# EAGLE board snesram (EAGLE 5.06), part 1 of 2
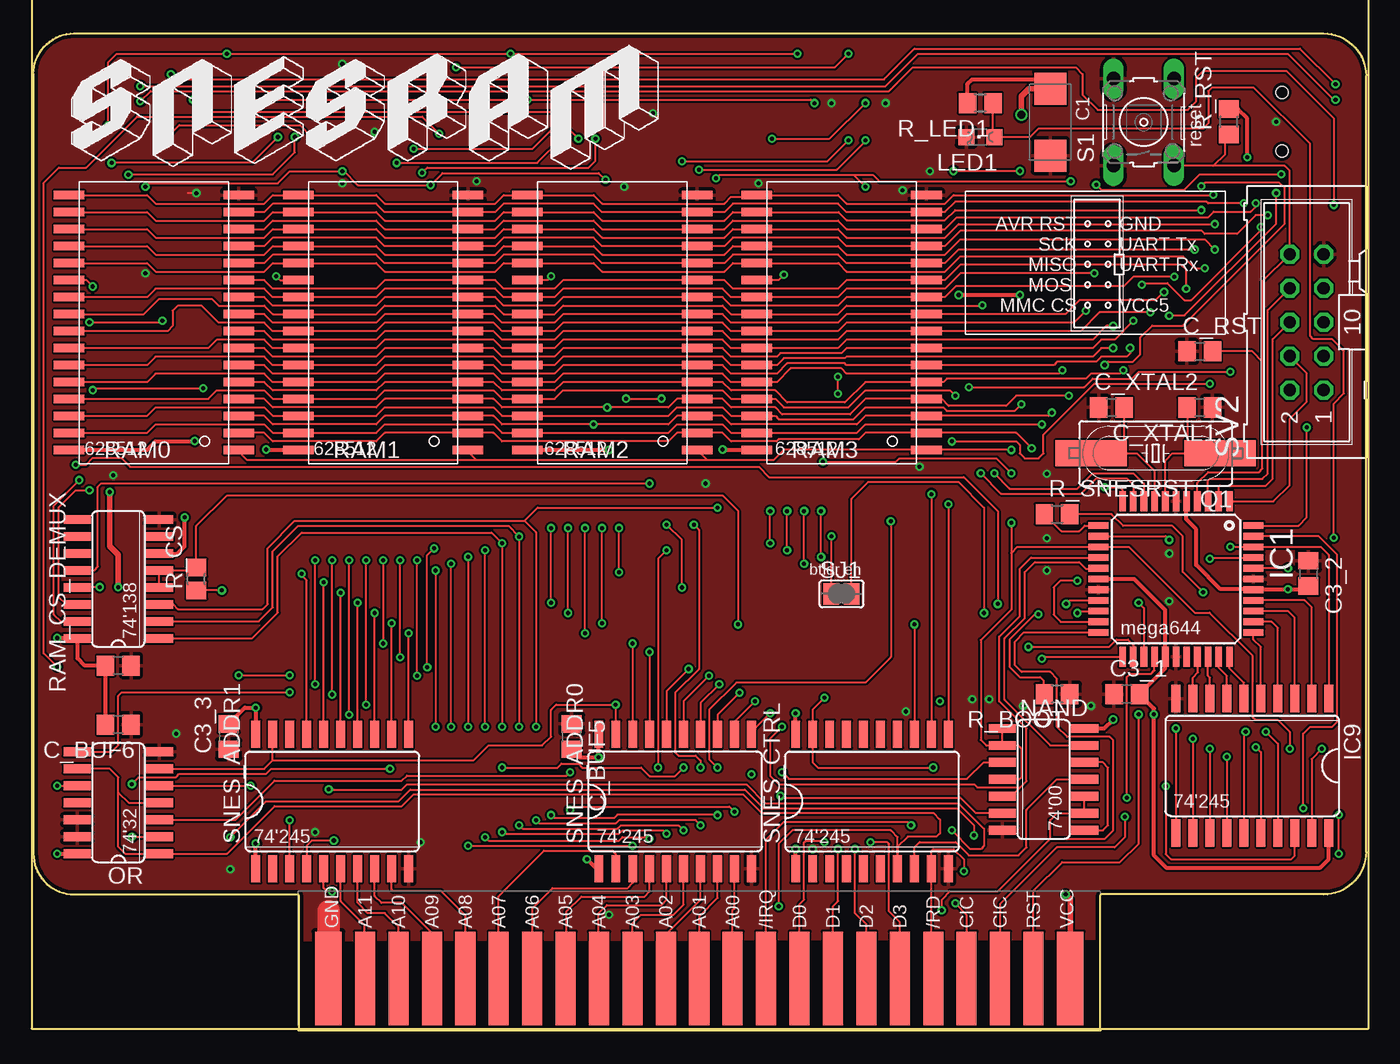
[diagram p0: board, top side]
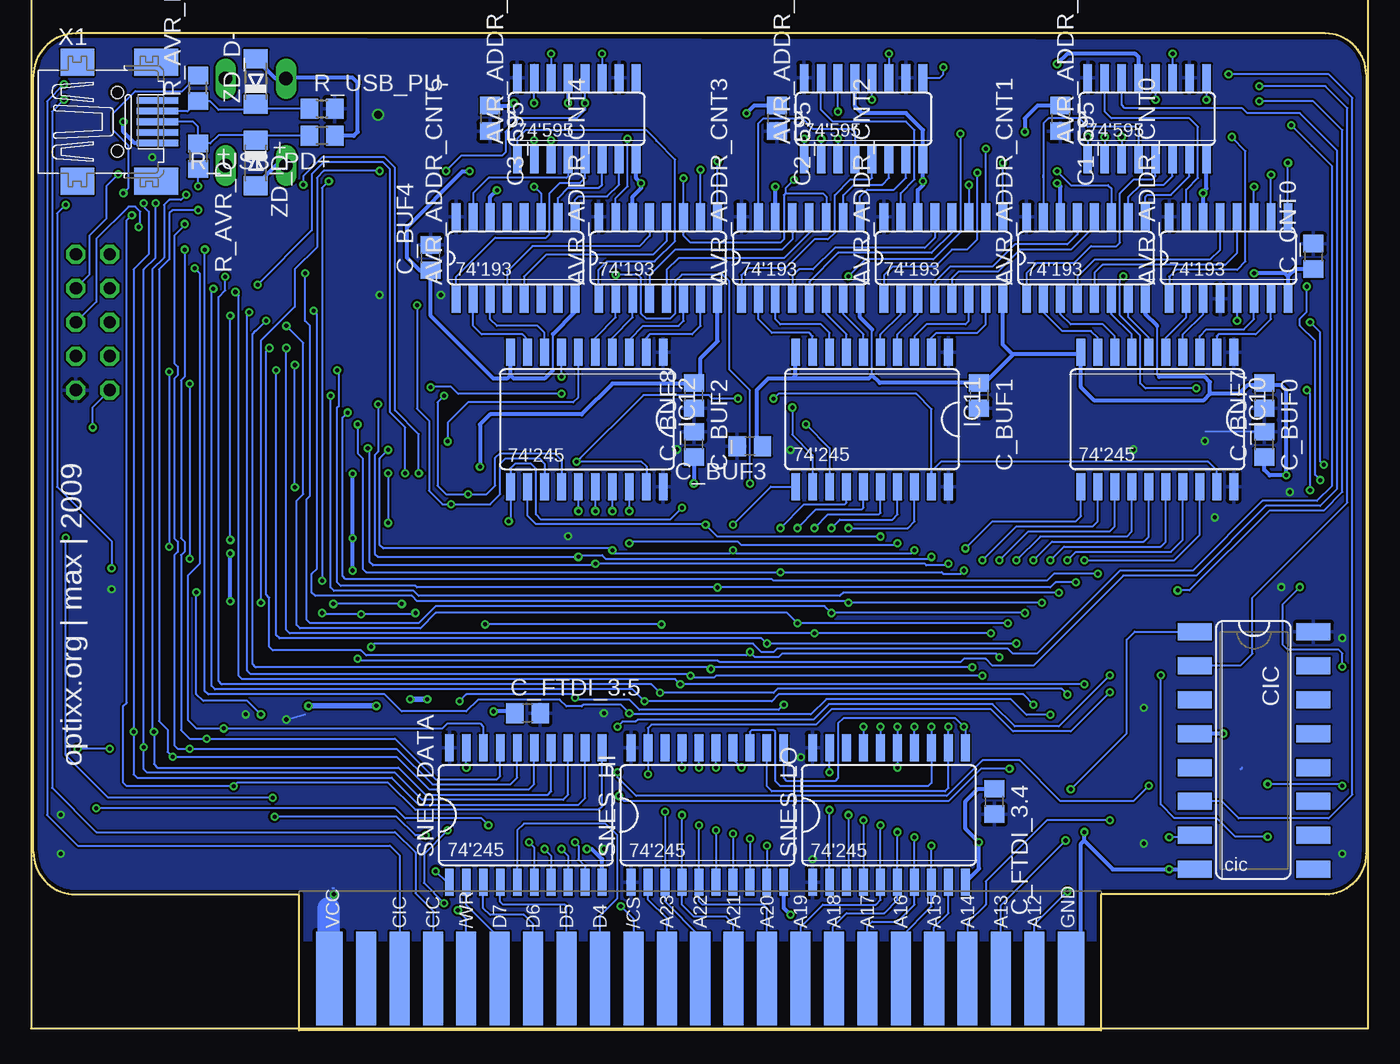
[diagram p1: board, bottom side, seen from below]

Size 99.7 x 74.55 mm. Coordinates in mm from the lower left corner, seen from the top.
Outline: 99.7,71.34 99.7,13.33 arc-90 96.52,10.16 79.88,10.16
Outline: 19.84,10.11 19.84,0 79.83,0 79.83,10.11
Outline: 19.81,10.16 3.05,10.16 arc-90 0,13.21 0,71.5 arc-90 3.05,74.55 96.52,74.55 arc-90 99.7,71.37
Copper layers (1*16): Top 0.035mm / dielectric 1.5mm / Bottom 0.035mm
Design rules "PropagandaPCB": minimum track width 6mil, minimum drill 10mil, track to track 6mil, track to pad 6mil, pad to pad 6mil, via to via 6mil, smd to smd 6mil, copper to edge 10mil, drill to drill 10mil, minimum pad ring 10mil, minimum via ring 6mil, stop-mask expansion 2mil, vias tented up to drill 100mil, thermal gap 10mil
Milling: 4 lines

## Footprints (pad centres in the part's own frame; a part is rotated, then mirrored left to right if it is on the bottom)
SO16 = smd 0.66 x 2.032: 1 -4.445,-3.073; 2 -3.175,-3.073; 3 -1.905,-3.073; 4 -0.635,-3.073; 5 0.635,-3.073; 6 1.905,-3.073; 7 3.175,-3.073; 8 4.445,-3.073; 9 4.445,3.073; 10 3.175,3.073; 11 1.905,3.073; 12 0.635,3.073; 13 -0.635,3.073; 14 -1.905,3.073; 15 -3.175,3.073; 16 -4.445,3.073
SMC_C = smd 2.4 x 2.4: + -2.5,0; - 2.5,0
C0805 = smd 1.3 x 1.5: 1 -0.95,0; 2 0.95,0
DIL16_SMD = smd 1.27 x 2.54: 1 -8.89,-4.445; 2 -6.35,-4.445; 3 -3.81,-4.445; 4 -1.27,-4.445; 5 1.27,-4.445; 6 3.81,-4.445; 7 6.35,-4.445; 8 8.89,-4.445; 9 8.89,4.445; 10 6.35,4.445; 11 3.81,4.445; 12 1.27,4.445; 13 -1.27,4.445; 14 -3.81,4.445; 15 -6.35,4.445; 16 -8.89,4.445
TQFP44 = smd 1.5 x 0.5: 1 -5.8,4; 2 -5.8,3.2; 3 -5.8,2.4; 4 -5.8,1.6; 5 -5.8,0.8; 6 -5.8,0; 7 -5.8,-0.8; 8 -5.8,-1.6; 9 -5.8,-2.4; 10 -5.8,-3.2; 11 -5.8,-4; 23 5.8,-4; 24 5.8,-3.2; 25 5.8,-2.4; 26 5.8,-1.6; 27 5.8,-0.8; 28 5.8,0; 29 5.8,0.8; 30 5.8,1.6; 31 5.8,2.4; 32 5.8,3.2; 33 5.8,4 | smd 0.5 x 1.5: 12 -4,-5.8; 13 -3.2,-5.8; 14 -2.4,-5.8; 15 -1.6,-5.8; 16 -0.8,-5.8; 17 0,-5.8; 18 0.8,-5.8; 19 1.6,-5.8; 20 2.4,-5.8; 21 3.2,-5.8; 22 4,-5.8; 34 4,5.8; 35 3.2,5.8; 36 2.4,5.8; 37 1.6,5.8; 38 0.8,5.8; 39 0,5.8; 40 -0.8,5.8; 41 -1.6,5.8; 42 -2.4,5.8; 43 -3.2,5.8; 44 -4,5.8
SO20W = smd 0.66 x 2.032: 1 -5.715,-5.029; 2 -4.445,-5.029; 3 -3.175,-5.029; 4 -1.905,-5.029; 5 -0.635,-5.029; 6 0.635,-5.029; 7 1.905,-5.029; 8 3.175,-5.029; 9 4.445,-5.029; 10 5.715,-5.029; 11 5.715,5.029; 12 4.445,5.029; 13 3.175,5.029; 14 1.905,5.029; 15 0.635,5.029; 16 -0.635,5.029; 17 -1.905,5.029; 18 -3.175,5.029; 19 -4.445,5.029; 20 -5.715,5.029
CHIPLED_0805 = smd 1.2 x 1.2: A 0,-1.05; C 0,1.05
SO14 = smd 0.66 x 2.032: 1 -3.81,-3.073; 2 -2.54,-3.073; 3 -1.27,-3.073; 4 0,-3.073; 5 1.27,-3.073; 6 2.54,-3.073; 7 3.81,-3.073; 8 3.81,3.073; 9 2.54,3.073; 10 1.27,3.073; 11 0,3.073; 12 -1.27,3.073; 13 -2.54,3.073; 14 -3.81,3.073
HC49UP = smd 5.334 x 1.93: 1 -4.826,0; 2 4.826,0
R0805 = smd 1.3 x 1.5: 1 -0.95,0; 2 0.95,0
R0805' = smd 1.3 x 1.5: 1 -0.85,0; 2 0.85,0
MEMORY-SAMSUNG-2_SOP-32 = smd 0.635 x 2.286: 1 -9.525,-6.35; 2 -8.255,-6.35; 3 -6.985,-6.35; 4 -5.715,-6.35; 5 -4.445,-6.35; 6 -3.175,-6.35; 7 -1.905,-6.35; 8 -0.635,-6.35; 9 0.635,-6.35; 10 1.905,-6.35; 11 3.175,-6.35; 12 4.445,-6.35; 13 5.715,-6.35; 14 6.985,-6.35; 15 8.255,-6.35; 16 9.525,-6.35; 17 9.525,6.35; 18 8.255,6.35; 19 6.985,6.35; 20 5.715,6.35; 21 4.445,6.35; 22 3.175,6.35; 23 1.905,6.35; 24 0.635,6.35; 25 -0.635,6.35; 26 -1.905,6.35; 27 -3.175,6.35; 28 -4.445,6.35; 29 -5.715,6.35; 30 -6.985,6.35; 31 -8.255,6.35; 32 -9.525,6.35
B3F-10XX = drill 1.016 long: 1 -3.251,2.261; 2 3.251,2.261; 3 -3.251,-2.261; 4 3.251,-2.261
SJ = smd 1.168 x 1.6: 1 -0.762,0; 2 0.762,0
ML10 = drill 0.914 octagon: 1 -5.08,-1.27; 2 -5.08,1.27; 3 -2.54,-1.27; 4 -2.54,1.27; 5 0,-1.27; 6 0,1.27; 7 2.54,-1.27; 8 2.54,1.27; 9 5.08,-1.27; 10 5.08,1.27
SNES_CON = smd 2 x 7: 5 2.25,3.5; 27 57.75,3.5 | smd 1.5 x 7: 6 5,3.5; 7 7.5,3.5; 8 10,3.5; 9 12.5,3.5; 10 15,3.5; 11 17.5,3.5; 12 20,3.5; 13 22.5,3.5; 14 25,3.5; 15 27.5,3.5; 16 30,3.5; 17 32.5,3.5; 18 35,3.5; 19 37.5,3.5; 20 40,3.5; 21 42.5,3.5; 22 45,3.5; 23 47.5,3.5; 24 50,3.5; 25 52.5,3.5; 26 55,3.5 | smd 2 x 7 bottom: 36 2.25,3.5; 58 57.75,3.5 | smd 1.5 x 7 bottom: 37 5,3.5; 38 7.5,3.5; 39 10,3.5; 40 12.5,3.5; 41 15,3.5; 42 17.5,3.5; 43 20,3.5; 44 22.5,3.5; 45 25,3.5; 46 27.5,3.5; 47 30,3.5; 48 32.5,3.5; 49 35,3.5; 50 37.5,3.5; 51 40,3.5; 52 42.5,3.5; 53 45,3.5; 54 47.5,3.5; 55 50,3.5; 56 52.5,3.5; 57 55,3.5
CON-CYPRESSINDUSTRIES_32005-201 = smd 0.5 x 3.1: 1 1.6,-9.027; 2 0.8,-9.027; 3 0,-9.027; 4 -0.8,-9.027; 5 -1.6,-9.027 | smd 2 x 2.5: M1 -4.45,-3.027; M2 4.45,-3.027 | smd 2 x 3.3: M3 4.45,-8.928; M4 -4.45,-8.928 | hole 0.9: 2.2,-6.027; -2.2,-6.027
MINIMELF = smd 1.4 x 1.8: A 1.7,0; C -1.7,0

## Placement (x,y rotation side)
AVR_ADDR_CNT0  40193D  [SO16]  10.29,57.77 0 bottom
AVR_ADDR_CNT1  40193D  [SO16]  20.96,57.75 0 bottom
AVR_ADDR_CNT2  40193D  [SO16]  31.62,57.75 0 bottom
AVR_ADDR_CNT3  40193D  [SO16]  42.29,57.75 0 bottom
AVR_ADDR_CNT4  40193D  [SO16]  52.96,57.75 0 bottom
AVR_ADDR_CNT5  40193D  [SO16]  63.63,57.75 0 bottom
AVR_ADDR_SREG0  74HCT595D  [SO16]  16.38,68.17 0 bottom
AVR_ADDR_SREG1  74HCT595D  [SO16]  37.59,68.17 0 bottom
AVR_ADDR_SREG2  74HCT595D  [SO16]  59.05,68.17 0 bottom
C1  [SMC_C]  76.07,67.91 270 top
C1_595  100n  [C0805]  22.86,68.2 270 bottom
C2_595  100n  [C0805]  44.07,68.2 270 bottom
C3_1  100n  [C0805]  81.79,25.15 0 top
C3_2  100n  [C0805]  95.38,34.16 270 top
C3_3  100n  [C0805]  14.6,21.97 90 top
C3_595  100n  [C0805]  65.53,68.2 270 bottom
C_BUF0  100n  [C0805]  7.62,47.47 270 bottom
C_BUF1  100n  [C0805]  28.96,47.47 270 bottom
C_BUF2  100n  [C0805]  50.29,47.47 270 bottom
C_BUF3  100n  [C0805]  46.1,43.69 180 bottom
C_BUF4  100n  [C0805]  69.98,57.78 90 bottom
C_BUF5  100n  [C0805]  40.26,21.97 270 top
C_BUF6  100n  [C0805]  6.35,22.86 180 top
C_BUF7  100n  [C0805]  7.62,43.81 90 bottom
C_BUF8  100n  [C0805]  50.29,43.81 90 bottom
C_CNT0  100n  [C0805]  3.94,57.88 90 bottom
C_DEMUX  100n  [C0805]  6.35,27.27 180 top
C_FTDI_3.4  100n  [C0805]  27.81,17.11 270 bottom
C_FTDI_3.5  100n  [C0805]  62.74,23.72 0 bottom
C_RST  47n  [C0805]  87.25,50.77 0 top
C_XTAL1  22p  [C0805]  87.25,46.58 180 top
C_XTAL2  22p  [C0805]  80.65,46.58 0 top
CIC  DIL16_SMD  [DIL16_SMD]  8.38,20.92 270 bottom
IC1  ATMEGA644A  [TQFP44]  85.47,33.75 270 top
IC9  74LS245DW  [SO20W]  91.19,19.78 180 top
IC10  74LS245DW  [SO20W]  15.62,45.69 180 bottom
IC11  74LS245DW  [SO20W]  36.96,45.69 180 bottom
IC12  74LS245DW  [SO20W]  58.29,45.69 180 bottom
LED1  2-4mA  [CHIPLED_0805]  70.83,66.8 90 top
NAND  74S00D  [SO14]  75.56,18.76 270 top
OR  74HC32D  [SO14]  6.35,17.02 90 top
Q1  20MHz  [HC49UP]  83.95,43.15 180 top
R_AVR_D+  68  [R0805]  87.38,65.37 270 bottom
R_AVR_D-  68  [R0805]  87.38,70.45 90 bottom
R_BOOT  10k  [R0805]  76.58,25.15 180 top
R_CS  200  [R0805']  12.19,33.75 90 top
R_LED1  1k6  [R0805]  70.83,69.34 180 top
R_RST  4k7  [R0805]  89.44,67.94 90 top
R_SNESRST  200  [R0805]  76.58,38.61 0 top
R_USB_PD+  1M  [R0805]  78.11,66.9 180 bottom
R_USB_PU-  1k5  [R0805]  78.11,68.93 0 bottom
RAM0  KM628512-XX  [MEMORY-SAMSUNG-2_SOP-32]  9.02,52.93 90 top
RAM1  KM628512-XX  [MEMORY-SAMSUNG-2_SOP-32]  26.16,52.93 90 top
RAM2  KM628512-XX  [MEMORY-SAMSUNG-2_SOP-32]  43.31,52.93 90 top
RAM3  KM628512-XX  [MEMORY-SAMSUNG-2_SOP-32]  60.45,52.93 90 top
RAM_CS_DEMUX  74LS138D  [SO16]  6.35,33.75 90 top
S1  [B3F-10XX]  83.06,67.91 90 top
SJ1  [SJ]  60.45,32.64 0 top
SNES_ADDR0  74LS245DW  [SO20W]  48.01,17.11 0 top
SNES_ADDR1  74LS245DW  [SO20W]  22.35,17.11 0 top
SNES_CTRL  74LS245DW  [SO20W]  62.74,17.11 0 top
SNES_DATA  74LS245DW  [SO20W]  62.86,16.1 0 bottom
SNES_HI  74LS245DW  [SO20W]  49.28,16.1 0 bottom
SNES_LO  74LS245DW  [SO20W]  35.69,16.1 0 bottom
SV2  [ML10]  95.25,52.96 90 top
U$3  SNES_CON_FRONT  [SNES_CON]  19.81,0.38 0 top
X1  MINI-USB  [CON-CYPRESSINDUSTRIES_32005-201]  99.44,67.94 90 bottom
ZD_D+  3.6V  [MINIMELF]  83.06,64.86 270 bottom
ZD_D-  3.6V  [MINIMELF]  83.06,70.96 90 bottom

## Library data of the parts
AVR_ADDR_CNT0 AVR_ADDR_CNT1-AVR_ADDR_CNT5 = 40xx
AVR_ADDR_SREG0 AVR_ADDR_SREG1 AVR_ADDR_SREG2 IC9-IC12 OR RAM_CS_DEMUX SNES_ADDR0 SNES_ADDR1 SNES_CTRL SNES_DATA SNES_HI SNES_LO = 74xx-eu
C1 C1_595 C2_595 C3_1-C3_3 C3_595 C_BUF0 C_BUF1-C_BUF8 C_CNT0 C_DEMUX C_FTDI_3.4 C_FTDI_3.5 C_RST C_XTAL1 C_XTAL2 R_AVR_D+ R_AVR_D- R_BOOT R_LED1 R_RST R_SNESRST R_USB_PD+ R_USB_PU- = rcl
CIC = ic-package
IC1 = atmel
LED1 = led
NAND = 74xx-us
Q1 = crystal
R_CS = resistor
RAM0 RAM1-RAM3 X1 = snesram
S1 = switch-omron
SJ1 = jumper
SV2 = con-harting-ml
U$3 = snes_con
ZD_D+ ZD_D- = diode

## Nets
A0: IC10.16 RAM0.12 RAM1.12 RAM2.12 RAM3.12 SNES_ADDR0.11
A1: IC10.15 RAM0.11 RAM1.11 RAM2.11 RAM3.11 SNES_ADDR0.12
A2: IC10.17 RAM0.10 RAM1.10 RAM2.10 RAM3.10 SNES_ADDR0.13
A3: IC10.18 RAM0.9 RAM1.9 RAM2.9 RAM3.9 SNES_ADDR0.14
A4: IC10.12 RAM0.8 RAM1.8 RAM2.8 RAM3.8 SNES_ADDR0.15
A5: IC10.11 RAM0.7 RAM1.7 RAM2.7 RAM3.7 SNES_ADDR0.16
A6: IC10.13 RAM0.6 RAM1.6 RAM2.6 RAM3.6 SNES_ADDR0.17
A7: IC10.14 RAM0.5 RAM1.5 RAM2.5 RAM3.5 SNES_ADDR0.18
A8: IC11.16 RAM0.27 RAM1.27 RAM2.27 RAM3.27 SNES_ADDR1.11
A9: IC11.15 RAM0.26 RAM1.26 RAM2.26 RAM3.26 SNES_ADDR1.12
A10: IC11.17 RAM0.23 RAM1.23 RAM2.23 RAM3.23 SNES_ADDR1.13
A11: IC11.18 RAM0.25 RAM1.25 RAM2.25 RAM3.25 SNES_ADDR1.14
A12: IC11.12 RAM0.4 RAM1.4 RAM2.4 RAM3.4 SNES_ADDR1.15
A13: IC11.11 RAM0.28 RAM1.28 RAM2.28 RAM3.28 SNES_ADDR1.16
A14: IC11.13 RAM0.3 RAM1.3 RAM2.3 RAM3.3 SNES_ADDR1.17
A15: IC11.14 RAM0.31 RAM1.31 RAM2.31 RAM3.31 SNES_HI.11 SNES_LO.11
A16: IC12.16 RAM0.2 RAM1.2 RAM2.2 RAM3.2 SNES_HI.12 SNES_LO.12
A17: IC12.15 RAM0.30 RAM1.30 RAM2.30 RAM3.30 SNES_HI.13 SNES_LO.13
A18: IC12.17 RAM0.1 RAM1.1 RAM2.1 RAM3.1 SNES_HI.14 SNES_LO.14
A19: IC12.18 RAM_CS_DEMUX.1 SNES_HI.15 SNES_LO.15
A20: IC12.12 RAM_CS_DEMUX.2 SNES_HI.16 SNES_LO.16
A21: IC12.11 RAM_CS_DEMUX.3 SNES_HI.17 SNES_LO.17
AVR/SNES_SW: IC1.14 IC9.19 IC10.19 IC11.19 IC12.19 NAND.1 NAND.2 NAND.4
AVR/SNES_SW_INV: OR.6 SNES_ADDR0.19 SNES_ADDR1.19 SNES_CTRL.19 SNES_DATA.19
AVR_ADDR_LATCH: AVR_ADDR_SREG0.12 AVR_ADDR_SREG1.12 AVR_ADDR_SREG2.12 IC1.25
AVR_ADDR_LOAD: AVR_ADDR_CNT0.11 AVR_ADDR_CNT1.11 AVR_ADDR_CNT2.11 AVR_ADDR_CNT3.11 AVR_ADDR_CNT4.11 AVR_ADDR_CNT5.11 IC1.21
AVR_ADDR_SCK: AVR_ADDR_SREG0.11 AVR_ADDR_SREG1.11 AVR_ADDR_SREG2.11 IC1.24
AVR_ADDR_SER: AVR_ADDR_SREG0.14 IC1.23
AVR_ADDR_UP: AVR_ADDR_CNT0.5 IC1.19
AVR_CS/: IC1.40 R_CS.1
AVR_D0: IC1.37 IC9.2
AVR_D1: IC1.36 IC9.3
AVR_D2: IC1.35 IC9.4
AVR_D3: IC1.34 IC9.5
AVR_D4: IC1.33 IC9.6
AVR_D5: IC1.32 IC9.7
AVR_D6: IC1.31 IC9.8
AVR_D7: IC1.30 IC9.9
AVR_D+: R_AVR_D+.1 R_USB_PD+.2 X1.3 ZD_D+.C
AVR_D-: R_AVR_D-.1 R_USB_PU-.1 X1.2 ZD_D-.C
AVR_RD/: IC1.42 IC9.1 IC12.7
AVR_SNES_WR_EN: IC1.16 NAND.13
AVR_UART_RX: IC1.9 SV2.5
AVR_UART_TX: IC1.10 SV2.7
AVR_WR/: IC1.41 IC12.6
CS/: R_CS.2 RAM_CS_DEMUX.4 RAM_CS_DEMUX.5 SNES_CTRL.13
CS_RAM0: RAM0.22 RAM_CS_DEMUX.15
CS_RAM1: RAM1.22 RAM_CS_DEMUX.14
CS_RAM2: RAM2.22 RAM_CS_DEMUX.13
CS_RAM3: RAM3.22 RAM_CS_DEMUX.12
D0: IC9.18 RAM0.13 RAM1.13 RAM2.13 RAM3.13 SNES_DATA.11
D1: IC9.17 RAM0.14 RAM1.14 RAM2.14 RAM3.14 SNES_DATA.12
D2: IC9.16 RAM0.15 RAM1.15 RAM2.15 RAM3.15 SNES_DATA.13
D3: IC9.15 RAM0.17 RAM1.17 RAM2.17 RAM3.17 SNES_DATA.14
D4: IC9.14 RAM0.18 RAM1.18 RAM2.18 RAM3.18 SNES_DATA.15
D5: IC9.13 RAM0.19 RAM1.19 RAM2.19 RAM3.19 SNES_DATA.16
D6: IC9.12 RAM0.20 RAM1.20 RAM2.20 RAM3.20 SNES_DATA.17
D7: IC9.11 RAM0.21 RAM1.21 RAM2.21 RAM3.21 SNES_DATA.18
GND: AVR_ADDR_CNT0.8 AVR_ADDR_CNT0.14 AVR_ADDR_CNT1.8 AVR_ADDR_CNT1.14 AVR_ADDR_CNT2.8 AVR_ADDR_CNT2.14 AVR_ADDR_CNT3.8 AVR_ADDR_CNT3.14 AVR_ADDR_CNT4.8 AVR_ADDR_CNT4.14 AVR_ADDR_CNT5.8 AVR_ADDR_CNT5.14 AVR_ADDR_SREG0.8 AVR_ADDR_SREG0.13 AVR_ADDR_SREG1.8 AVR_ADDR_SREG1.13 AVR_ADDR_SREG2.8 AVR_ADDR_SREG2.13 C1.- C1_595.1 C2_595.1 C3_1.1 C3_2.1 C3_3.1 C3_595.1 C_BUF0.1 C_BUF1.1 C_BUF2.1 C_BUF3.1 C_BUF4.1 C_BUF5.1 C_BUF6.1 C_BUF7.1 C_BUF8.1 C_CNT0.1 C_DEMUX.1 C_FTDI_3.4.1 C_FTDI_3.5.1 C_RST.1 C_XTAL1.1 C_XTAL2.1 CIC.4 CIC.8 IC1.6 IC1.18 IC1.28 IC1.39 IC9.10 IC10.10 IC11.10 IC12.10 LED1.C NAND.7 OR.7 OR.12 OR.13 R_BOOT.1 R_USB_PD+.1 RAM0.16 RAM1.16 RAM2.16 RAM3.16 RAM_CS_DEMUX.8 S1.1 S1.2 SNES_ADDR0.10 SNES_ADDR1.10 SNES_CTRL.10 SNES_DATA.10 SNES_HI.10 SNES_LO.10 SV2.9 U$3.5 U$3.36 X1.5 ZD_D+.A ZD_D-.A
HI/LOROM_SW: IC1.15 NAND.5 OR.2
HI/LOROM_SW_INV: OR.8 SNES_HI.19
ISP_MISO: IC1.2 SV2.6
ISP_MOSI: IC1.1 SV2.4
ISP_RST: C_RST.2 IC1.4 R_RST.1 S1.3 SV2.10
ISP_SCK: IC1.3 SV2.8
LED: IC1.26 LED1.A R_LED1.1
MMC_CS: IC1.44 SV2.2
N1337: OR.3 SNES_LO.19
N$1: AVR_ADDR_CNT0.7 IC10.2
N$2: AVR_ADDR_CNT2.3 IC11.4
N$3: AVR_ADDR_CNT0.2 IC10.5
N$4: AVR_ADDR_CNT0.3 IC10.4
N$5: AVR_ADDR_CNT1.7 IC10.6
N$6: AVR_ADDR_CNT1.6 IC10.7
N$7: AVR_ADDR_CNT1.2 IC10.9
N$8: AVR_ADDR_CNT1.3 IC10.8
N$9: AVR_ADDR_CNT0.12 AVR_ADDR_CNT1.5
N$10: AVR_ADDR_CNT0.13 AVR_ADDR_CNT1.4
N$11: AVR_ADDR_SREG0.9 AVR_ADDR_SREG1.14
N$12: AVR_ADDR_CNT0.15 AVR_ADDR_SREG0.15
N$13: AVR_ADDR_CNT0.1 AVR_ADDR_SREG0.1
N$14: AVR_ADDR_CNT0.10 AVR_ADDR_SREG0.2
N$15: AVR_ADDR_CNT0.9 AVR_ADDR_SREG0.3
N$16: AVR_ADDR_CNT1.15 AVR_ADDR_SREG0.4
N$17: AVR_ADDR_CNT1.1 AVR_ADDR_SREG0.5
N$18: AVR_ADDR_CNT1.10 AVR_ADDR_SREG0.6
N$19: AVR_ADDR_CNT1.9 AVR_ADDR_SREG0.7
N$20: AVR_ADDR_CNT3.9 AVR_ADDR_SREG1.7
N$21: AVR_ADDR_CNT2.1 AVR_ADDR_SREG1.1
N$22: AVR_ADDR_CNT2.10 AVR_ADDR_SREG1.2
N$23: AVR_ADDR_CNT2.9 AVR_ADDR_SREG1.3
N$24: AVR_ADDR_CNT1.12 AVR_ADDR_CNT2.5
N$25: AVR_ADDR_CNT1.13 AVR_ADDR_CNT2.4
N$26: AVR_ADDR_CNT2.2 IC11.5
N$27: AVR_ADDR_CNT2.6 IC11.3
N$28: AVR_ADDR_CNT2.7 IC11.2
N$29: AVR_ADDR_CNT4.3 IC12.4
N$30: AVR_ADDR_CNT3.15 AVR_ADDR_SREG1.4
N$31: AVR_ADDR_CNT3.1 AVR_ADDR_SREG1.5
N$32: AVR_ADDR_CNT3.10 AVR_ADDR_SREG1.6
N$33: AVR_ADDR_CNT3.3 IC11.8
N$34: AVR_ADDR_CNT3.2 IC11.9
N$35: AVR_ADDR_CNT3.6 IC11.7
N$36: AVR_ADDR_CNT3.7 IC11.6
N$37: AVR_ADDR_CNT2.15 AVR_ADDR_SREG1.15
N$38: AVR_ADDR_SREG1.9 AVR_ADDR_SREG2.14
N$39: AVR_ADDR_CNT2.12 AVR_ADDR_CNT3.5
N$40: AVR_ADDR_CNT2.13 AVR_ADDR_CNT3.4
N$41: AVR_ADDR_CNT3.12 AVR_ADDR_CNT4.5
N$42: AVR_ADDR_CNT3.13 AVR_ADDR_CNT4.4
N$43: AVR_ADDR_CNT4.2 IC12.5
N$44: AVR_ADDR_CNT4.6 IC12.3
N$45: AVR_ADDR_CNT4.7 IC12.2
N$46: NAND.8 NAND.12
N$47: AVR_ADDR_CNT4.12 AVR_ADDR_CNT5.5
N$48: AVR_ADDR_CNT4.13 AVR_ADDR_CNT5.4
N$49: AVR_ADDR_CNT5.3 IC12.8
N$50: AVR_ADDR_CNT5.2 IC12.9
N$51: NAND.3 OR.5
N$52: NAND.11 SNES_CTRL.8
N$53: AVR_ADDR_CNT4.15 AVR_ADDR_SREG2.15
N$54: AVR_ADDR_CNT4.1 AVR_ADDR_SREG2.1
N$55: AVR_ADDR_CNT4.10 AVR_ADDR_SREG2.2
N$56: AVR_ADDR_CNT4.9 AVR_ADDR_SREG2.3
N$57: AVR_ADDR_CNT5.15 AVR_ADDR_SREG2.4
N$58: AVR_ADDR_CNT5.1 AVR_ADDR_SREG2.5
N$59: AVR_ADDR_CNT5.10 AVR_ADDR_SREG2.6
N$60: AVR_ADDR_CNT5.9 AVR_ADDR_SREG2.7
N$61: IC1.13 R_AVR_D-.2
N$62: IC1.11 R_AVR_D+.2
N$63: C_XTAL2.2 IC1.8 Q1.2
N$64: AVR_ADDR_CNT0.6 IC10.3
N$65: NAND.6 OR.10
N$66: IC1.12 R_SNESRST.1
N$68: C_XTAL1.2 IC1.7 Q1.1
N$69: IC1.20 R_BOOT.2 SJ1.2
OE/: IC12.13 RAM0.24 RAM1.24 RAM2.24 RAM3.24 SNES_CTRL.11
SNES_PIN06_A11: SNES_ADDR1.6 U$3.6
SNES_PIN07_A10: SNES_ADDR1.7 U$3.7
SNES_PIN08_A9: SNES_ADDR1.8 U$3.8
SNES_PIN09_A8: SNES_ADDR1.9 U$3.9
SNES_PIN10_A7: SNES_ADDR0.2 U$3.10
SNES_PIN11_A6: SNES_ADDR0.3 U$3.11
SNES_PIN12_A5: SNES_ADDR0.4 U$3.12
SNES_PIN13_A4: SNES_ADDR0.5 U$3.13
SNES_PIN14_A3: SNES_ADDR0.6 U$3.14
SNES_PIN15_A2: SNES_ADDR0.7 U$3.15
SNES_PIN16_A1: SNES_ADDR0.8 U$3.16
SNES_PIN17_A0: SNES_ADDR0.9 U$3.17
SNES_PIN18_/IRQ: IC1.43 U$3.18
SNES_PIN19_D0: SNES_DATA.9 U$3.19
SNES_PIN20_D1: SNES_DATA.8 U$3.20
SNES_PIN21_D2: SNES_DATA.7 U$3.21
SNES_PIN22_D3: SNES_DATA.6 U$3.22
SNES_PIN23_/RD: SNES_CTRL.9 SNES_DATA.1 U$3.23
SNES_PIN24_CICO1: CIC.1 U$3.24
SNES_PIN25_CICI7: CIC.7 U$3.25
SNES_PIN37_A12: SNES_ADDR1.5 U$3.37
SNES_PIN38_A13: SNES_ADDR1.4 U$3.38
SNES_PIN39_A14: SNES_ADDR1.3 U$3.39
SNES_PIN40_A15: SNES_LO.9 U$3.40
SNES_PIN41_BA0: SNES_HI.9 SNES_LO.8 U$3.41
SNES_PIN42_BA1: SNES_HI.8 SNES_LO.7 U$3.42
SNES_PIN43_BA2: SNES_HI.7 SNES_LO.6 U$3.43
SNES_PIN44_BA3: SNES_HI.6 SNES_LO.5 U$3.44
SNES_PIN45_BA4: SNES_HI.5 SNES_LO.4 U$3.45
SNES_PIN46_BA5: SNES_HI.4 SNES_LO.3 U$3.46
SNES_PIN47_BA6: SNES_HI.3 SNES_LO.2 U$3.47
SNES_PIN48_BA7: SNES_HI.2 U$3.48
SNES_PIN49_/CS: OR.1 OR.4 OR.9 SNES_CTRL.7 U$3.49
SNES_PIN50_D4: SNES_DATA.5 U$3.50
SNES_PIN51_D5: SNES_DATA.4 U$3.51
SNES_PIN52_D6: SNES_DATA.3 U$3.52
SNES_PIN53_D7: SNES_DATA.2 U$3.53
SNES_PIN54_/WR: IC1.22 NAND.9 NAND.10 U$3.54
SNES_PIN55_CICO2: CIC.2 U$3.55
SNES_PIN56_CICI6: CIC.6 U$3.56
SNES_PIN_26_RST: R_SNESRST.2 U$3.26
VCC: AVR_ADDR_CNT0.4 AVR_ADDR_CNT0.16 AVR_ADDR_CNT1.16 AVR_ADDR_CNT2.16 AVR_ADDR_CNT3.16 AVR_ADDR_CNT4.16 AVR_ADDR_CNT5.16 AVR_ADDR_SREG0.10 AVR_ADDR_SREG0.16 AVR_ADDR_SREG1.10 AVR_ADDR_SREG1.16 AVR_ADDR_SREG2.10 AVR_ADDR_SREG2.16 C1.+ C1_595.2 C2_595.2 C3_1.2 C3_2.2 C3_3.2 C3_595.2 C_BUF0.2 C_BUF1.2 C_BUF2.2 C_BUF3.2 C_BUF4.2 C_BUF5.2 C_BUF6.2 C_BUF7.2 C_BUF8.2 C_CNT0.2 C_DEMUX.2 C_FTDI_3.4.2 C_FTDI_3.5.2 CIC.16 IC1.5 IC1.17 IC1.27 IC1.38 IC9.20 IC10.1 IC10.20 IC11.1 IC11.20 IC12.1 IC12.20 NAND.14 OR.14 R_LED1.2 R_RST.2 R_USB_PU-.2 RAM0.32 RAM1.32 RAM2.32 RAM3.32 RAM_CS_DEMUX.6 RAM_CS_DEMUX.16 SJ1.1 SNES_ADDR0.1 SNES_ADDR0.20 SNES_ADDR1.1 SNES_ADDR1.20 SNES_CTRL.1 SNES_CTRL.20 SNES_DATA.20 SNES_HI.1 SNES_HI.20 SNES_LO.1 SNES_LO.20 SV2.1 U$3.27 U$3.58
WE/: IC12.14 RAM0.29 RAM1.29 RAM2.29 RAM3.29 SNES_CTRL.12